# Altium PCB Copy of PCB.PcbDoc
Units mil, origin at the board's own origin, x right, y up, seen from the top; angles counter-clockwise.
Board outline 2570 x 1020 mil, 4 copper layers (Top Layer, Layer 1, Layer 2, Bottom Layer), stack 23.756 mil thick; 32 components, 41 nets, 168 pads, 105 vias.
Unrouted connection lines stored in the file: 1.
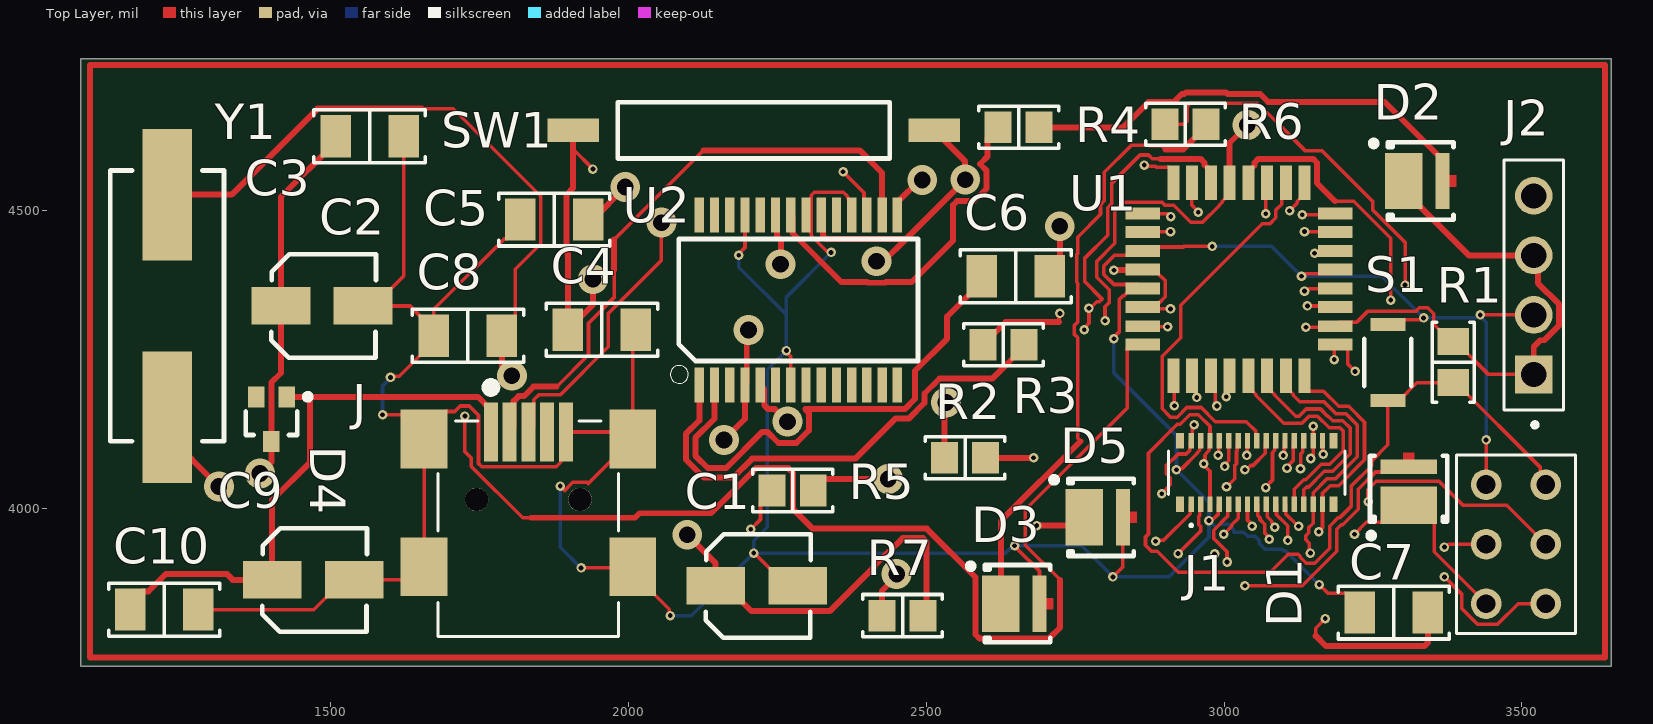
[diagram p0: Top Layer view]
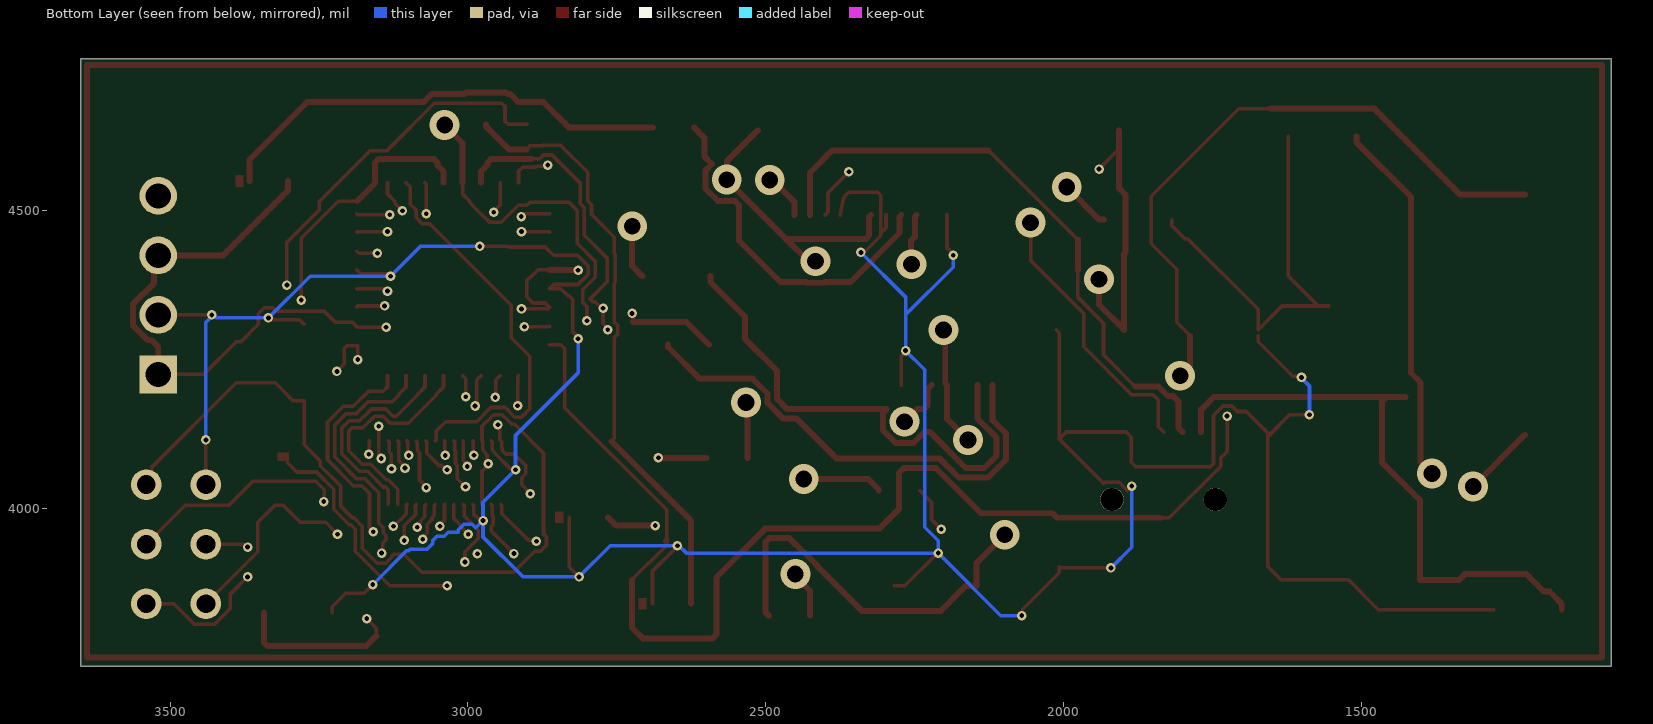
[diagram p1: Bottom Layer view, seen from below]
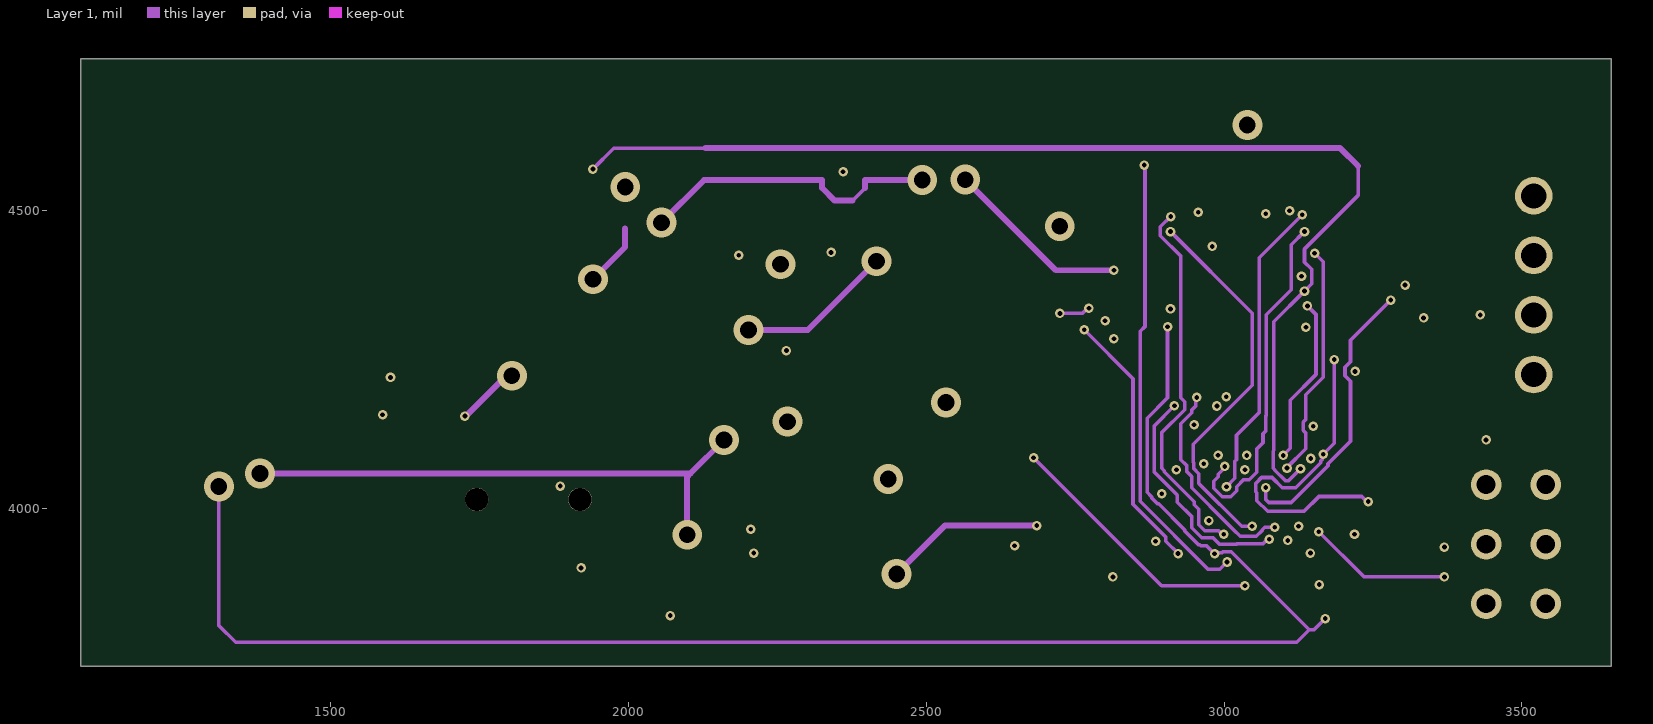
[diagram p2: Layer 1]
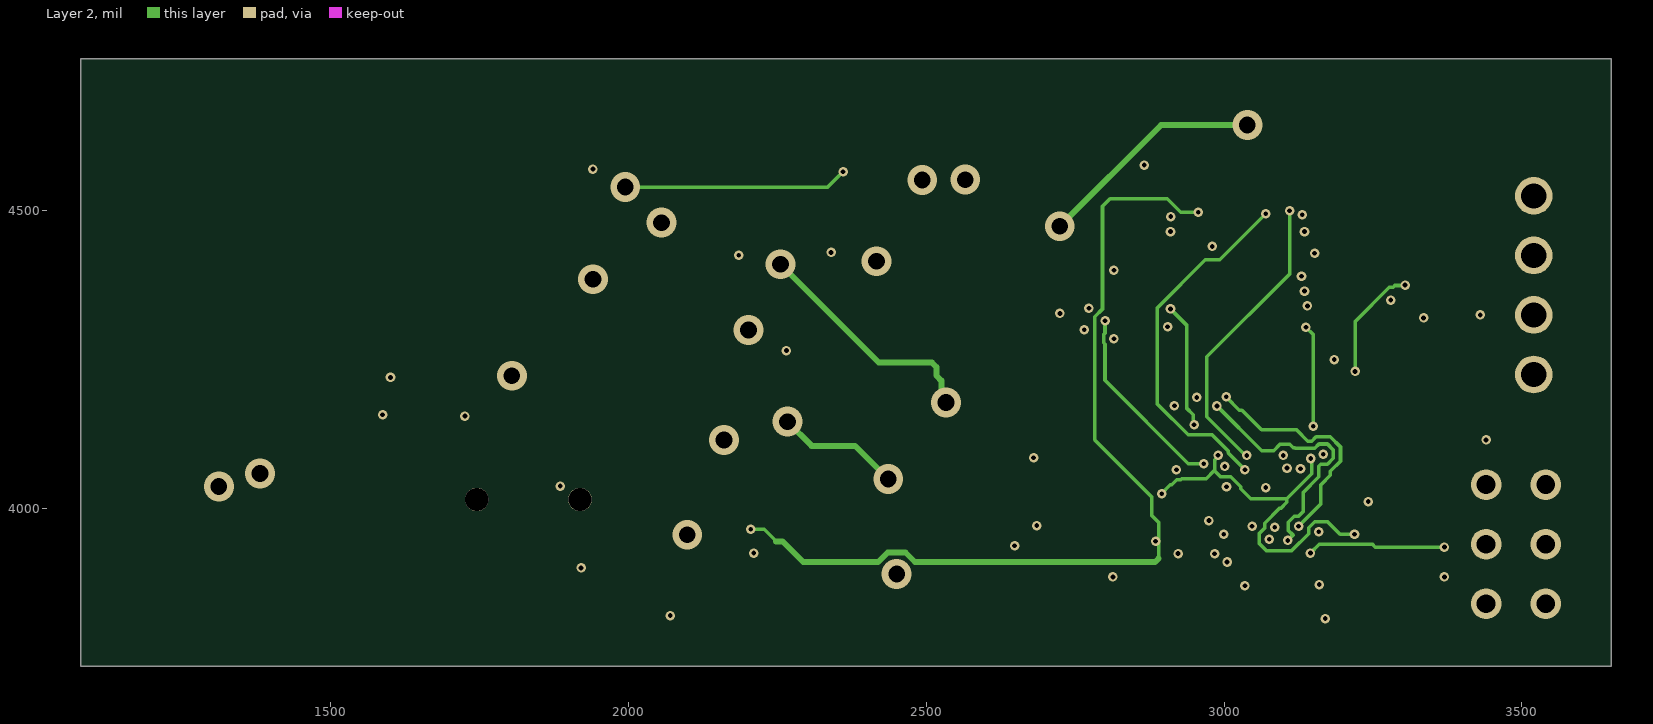
[diagram p3: Layer 2]

## Layer stack, top to bottom
Top Solder: solder mask 0.4, Solder Resist, Dk 3.5
Top Layer: signal copper 1.4
Dielectric 2: prepreg 2.8, PP-006, Dk 4.1
Layer 1: signal copper 1.378
Dielectric 1: dielectric 12.6, FR-4, Dk 4.8
Layer 2: signal copper 1.378
Dielectric 3: prepreg 2.8, PP-006, Dk 4.1
Bottom Layer: signal copper 1.4
Bottom Solder: solder mask 0.4, Solder Resist, Dk 3.5

## Board outline
1080,3735 3650,3735 3650,4755 1080,4755

## Design rules (kind name [scope] priority, off if disabled: settings)
Clearance [All] p1: gap=6 ignorepadtopadclearanceinfootprint=FALSE
PolygonConnect [All] p1: connectstyle=Relief reliefconductorwidth=10 reliefentries=4 polygonreliefangle="90 Angle" airgapwidth=10
RoutingVias RoutingVias_1 [All] p1: holewidth=8 width=16 viastyle="Through Hole" minholewidth=8 minwidth=16 maxholewidth=8 maxwidth=16
RoutingVias [All] p2 off: holewidth=28 width=50 viastyle="Through Hole" minholewidth=28 minwidth=50 maxholewidth=28 maxwidth=50
SolderMaskExpansion [All] p1: expansion=4 istentingtop=FALSE
SupplyNets "Schematic Supply Nets_3" [InNet('GND')] p1: voltage=0.000
SupplyNets "Schematic Supply Nets_2" [InNet('VUSB')] p2: voltage=0.000
SupplyNets "Schematic Supply Nets_1" [InNet('3V3')] p3: voltage=0.000
SupplyNets "Schematic Supply Nets" [InNet('+5')] p4: voltage=0.000
Width Width_1 [All] p1: maxlimit=6 minlimit=6 preferedwidth=6 minimp=50.000000 maximp=50.000000 favimp=50.000000
Width [All] p2 off: maxlimit=10 minlimit=10 preferedwidth=10
30 further rules are at their usual default settings.

## Classes and differential pairs
component class Schematic: C1 C2 C3 C4 C5 C6 C7 C8 C9 C10 C11 D1 D2 D3 D4 D5 J J2 R1 R2 R3 R4 R5 R6 R7 S1 SW1

## Components (designator, comment, footprint, x,y, rotation, side; value= is the part's Value field where it differs from the comment)
C1 "4.7 uF" "CAP ALSMD 4.3MM H5.4MM" 2215,3870 r0 top value="10 µF"
C2 "4.7 uF" "CAP ALSMD 4.3MM H5.4MM" 1485,4340 r0 top value="10 µF"
C3 "1000 pF" "CAP 1206_3216 - 0.8MM" 1565,4625 r180 top
C4 "1000 pF" "CAP 1206_3216 - 0.8MM" 1955,4300 r0 top
C5 "1000 pF" "CAP 1206_3216 - 0.8MM" 1875,4485 r0 top
C6 "1000 pF" "CAP 1206_3216 - 0.8MM" 2650,4390 r0 top
C7 "1000 pF" "CAP 1206_3216 - 0.8MM" 3285,3825 r0 top
C8 "1000 pF" "CAP 1206_3216 - 0.8MM" 1730,4290 r0 top
C9 "" "CAP ALSMD 4.3MM H5.4MM" 1470,3880 r0 top value="10 µF"
C10 "1000 pF" "CAP 1206_3216 - 0.8MM" 1220,3830 r0 top
C11 "1000 pF" "CAP 1206_3216 - 0.8MM" 7150,1050 r0 top
D1 "" "LUMINUS MP-3030-110" 3310,4033.15 r90 top
D2 "" "LUMINUS MP-3030-110" 3330,4550 r0 top
D3 "L_AMBER" "LUMINUS MP-3030-110" 2653.15,3840 r0 top
D4 "BZX84W-B43F" "DIODES SOT-323-3" 1400,4150 r270 top
D5 "MP-3030-1100-57-70" "LUMINUS MP-3030-110" 2793.19,3985 r0 top
J "MUSB-05-S-B-SM-A" SAMTEC_MUSB-05-S-B-SM-A 1831.61,4128.39 r0 top
J1 "DF40C-30DP-0.4V(51)" HRS_DF40C-30DP-0.4V(51) 3055,4060 r0 top
J2 "PPTC041LFBN-RC" SULLINS_PPTC041LFBN-RC 3520,4375 r90 top
R1 "1K Ohms" "RES 0805_2012" 3385,4245.55 r270 top
R2 "" "RES 0805_2012" 2565,4085 r180 top
R3 "1K Ohms" "RES 0805_2012" 2629.45,4275 r0 top
R4 "" "RES 0805_2012" 2655,4640 r0 top
R5 "1K Ohms" "RES 0805_2012" 2275.55,4030 r0 top
R6 "680 Ohm" "RES 0805_2012" 2935,4645 r0 top
R7 "1.8 MOhms" "RES 0805_2012" 2460,3820 r0 top
S1 "KXT 311 LHS" "C&K KXT3" 3275,4245 r90 top
SW1 "CT10-1530-G1" "COTO TECHNOLOGY - CT10 G1" 2210,4635 r0 top
U1 "ATMEGA168-20AUR" QFP80P900X900X120-32N 3025,4385 r0 top
U2 "INTERFACE-FT232RL(SSOP28)" SSOP28-0.65-10.2X5.2MM 2285,4350 r0 top
Y1 "16 MHz" "ABRACON ABLS" 1225,4340 r90 top value="37.5 MHz"
? "AVR-ISP" AVR-ISP 3490,3940 r90 top

## Footprints (in the part's own frame and the unit in brackets; to place one, negate y for a bottom-side part, rotate by r counter-clockwise, add the part's x,y. Pads: shape width x height; smd on the part's side, far side on the other; paste and mask are expansions set on the pad)
"ABRACON ABLS" [mm] "Crystal, 2-Leads, Body 4.70x11.40mm, Pitch 8.80mm, IPC Medium Density"
  rect 5.6x2.1 smd: 1(-4.75,0) 2(4.75,0)
  silkscreen extent -5.77,-2.43 5.77,2.43, body extent -6.35,-2.35 6.35,2.35, height 4.2
AVR-ISP [mm]
  round 1.308 hole 0.8: GND(2.54,1.27) MISO(-2.54,-1.27) MOSI(0,1.27) RST(2.54,-1.27) SCK(0,-1.27) VCC(-2.54,1.27)
  silkscreen extent -3.81,-2.54 3.81,2.54
"C&K KXT3" [mm]
  rect 0.55x1.5 smd: 1(-1.625,0) 2(1.625,0)
  silkscreen extent -1,-1 1,1, body extent -1.75,-1 1.75,1, height 0.58
"CAP 1206_3216 - 0.8MM" [mm] "Chip Capacitor, 2-Leads, Body 3.25x1.60mm, IPC Medium Density"
  rect 1.3x1.8 smd: 1(-1.45,0) 2(1.45,0)
  silkscreen extent -2.37,-1.12 2.37,1.12, body extent -1.6,-0.8 1.6,0.8, height 0.8
"CAP ALSMD 4.3MM H5.4MM" [mm] "Aluminum Electrolytic Capacitor, Body 4.30x4.30x5.40mm, IPC Low Density"
  rect 2.5x1.6 smd: 1(-1.75,0) 2(1.75,0)
  silkscreen extent -2.17,-2.21 2.3,2.2, body extent -2.3,-2.2 2.3,2.2, height 5.4
"COTO TECHNOLOGY - CT10 G1" [mm] "Switch, Body 16.38x2.92x2.41mm, IPC Medium Density"
  rect 2.2x1 smd: 1(-7.7,0) 2(7.7,0)
  silkscreen extent -5.8,-1.2 5.8,1.2, body extent -8.23,-1.2 8.23,1.2, height 2.96
"DIODES SOT-323-3" [mm] "SOT323, 3-Leads, Body 2.00x2.10mm, Pitch 0.65mm, IPC Medium Density"
  rect 0.9x0.7 smd: 1(-0.95,0.65) 2(0.95,0) 3(-0.95,-0.65)
  silkscreen extent -1.07,-1.1 0.67,1.68, body extent -1.06,-1 1.06,1, height 1
HRS_DF40C-30DP-0.4V(51) [mm]
  rect 0.23x0.66 smd paste-1 mask+0: 1(-2.8,-1.355) 2(-2.8,1.355) 3(-2.4,-1.355) 4(-2.4,1.355) 5(-2,-1.355) 6(-2,1.355) 7(-1.6,-1.355) 8(-1.6,1.355) 9(-1.2,-1.355) 10(-1.2,1.355) 11(-0.8,-1.355) 12(-0.8,1.355) 13(-0.4,-1.355) 14(-0.4,1.355) 15(0,-1.355) 16(0,1.355) 17(0.4,-1.355) 18(0.4,1.355) 19(0.8,-1.355) 20(0.8,1.355) 21(1.2,-1.355) 22(1.2,1.355) 23(1.6,-1.355) 24(1.6,1.355) 25(2,-1.355) 26(2,1.355) 27(2.4,-1.355) 28(2.4,1.355) 29(2.8,-1.355) 30(2.8,1.355)
  rect 0.35x0.66 smd paste-1: S1(-3.275,-1.355) S2(-3.275,1.355) S3(3.275,-1.355) S4(3.275,1.355)
  silkscreen extent -3.76,-2.31 3.76,0.92, body extent -3.76,-1.49 3.76,1.49, height 1.14
"LUMINUS MP-3030-110" [mm]
  rect 1.6x2.4 smd paste-0.25: 1(-0.715,0)
  rect 0.6x2.4 smd paste-0.2: 2(0.935,0)
  Top Layer region: 1.185,-0.251 1.535,-0.251 1.535,0.249 1.185,0.249
  silkscreen extent -2.12,-1.65 1.4,1.72, body extent -1.51,-1.51 1.51,1.51, height 0.53
QFP80P900X900X120-32N [mil]
  rect 58x20 smd: 1(-162,110) 2(-162,79) 3(-162,47) 4(-162,16) 5(-162,-16) 6(-162,-47) 7(-162,-79) 8(-162,-110) 17(162,-110) 18(162,-79) 19(162,-47) 20(162,-16) 21(162,16) 22(162,47) 23(162,79) 24(162,110)
  rect 20x58 smd: 9(-110,-162) 10(-79,-162) 11(-47,-162) 12(-16,-162) 13(16,-162) 14(47,-162) 15(79,-162) 16(110,-162) 25(110,162) 26(79,162) 27(47,162) 28(16,162) 29(-16,162) 30(-47,162) 31(-79,162) 32(-110,162)
  body extent -177,-177 177,177, height 47
"RES 0805_2012" [mm] "Chip Resistor, 2-Leads, Body 2.00x1.25mm, IPC Medium Density"
  rect 1.15x1.35 smd: 1(-0.875,0) 2(0.875,0)
  silkscreen extent -1.7,-0.9 1.7,0.9, body extent -1,-0.62 1,0.63, height 0.6
SAMTEC_MUSB-05-S-B-SM-A [mm]
  rect 0.6x2.5 smd: 1(-1.6,0) 2(-0.8,0) 3(0,0) 4(0.8,0) 5(1.6,0)
  rect 2x2.5 smd: 6(-4.45,-0.3) 7(4.45,-0.3) 8(-4.45,-5.75) 9(4.45,-5.75)
  round 1 hole 1 unplated: ""(-2.2,-2.88) ""(2.2,-2.88)
  silkscreen extent -3.85,-8.73 3.85,2.1
SSOP28-0.65-10.2X5.2MM [mm]
  rect 0.4x1.5 smd: 1(-4.225,-3.625) 2(-3.575,-3.625) 3(-2.925,-3.625) 4(-2.275,-3.625) 5(-1.625,-3.625) 6(-0.975,-3.625) 7(-0.325,-3.625) 8(0.325,-3.625) 9(0.975,-3.625) 10(1.625,-3.625) 11(2.275,-3.625) 12(2.925,-3.625) 13(3.575,-3.625) 14(4.225,-3.625) 15(4.225,3.625) 16(3.575,3.625) 17(2.925,3.625) 18(2.275,3.625) 19(1.625,3.625) 20(0.975,3.625) 21(0.325,3.625) 22(-0.325,3.625) 23(-0.975,3.625) 24(-1.625,3.625) 25(-2.275,3.625) 26(-2.925,3.625) 27(-3.575,3.625) 28(-4.225,3.625)
  silkscreen extent -5.46,-3.56 5.1,2.6, body extent -3.9,-5.1 3.9,5.1, height 2
SULLINS_PPTC041LFBN-RC [mm]
  rect 1.605x1.605 / inner round 1.605 / far side rect 1.605x1.605 hole 1.07: 1(-3.81,0)
  round 1.605 hole 1.07: 2(-1.27,0) 3(1.27,0) 4(3.81,0)
  silkscreen extent -6.06,-1.27 5.33,1.27, body extent -5.33,-1.27 5.33,1.27, height 8.51

## Part data
C1 C2 C9: library part UWX1C100MCL1GB, "CAP ALUM 10UF 20% 16V SMD", Capacitance="10 µF", Device Package="Radial, Can - SMD", Lifetime @ Temp.="2000 Hrs @ 85°C", manufacturer=Nichicon, Operating Temperature="-40°C ~ 85°C", Ripple Current @ High Frequency="34.5 mA @ 10 kHz", Ripple Current @ Low Frequency="23 mA @ 120 Hz", Supplier Part Number 1=493-2100-1-ND, Tolerance=±20%, Voltage - Rated="16 V", Applications="General Purpose", componentlink1description=Datasheet, componentlink1url=https://products.nichicon.co.jp/en/pdf/XJA043/e-uwx.pdf, componentlink2description="DigiKey Link", componentlink2url=https://www.digikey.com/en/products/detail/nichicon/UWX1C100MCL1GB/589841, Height - Seated (Max)="0.213\" (5.40mm)", lastupdated="6/3/2024 7:53:00 PM", Lifecycle Status=Active, Minimum Order=1, Mounting Type="Surface Mount", Package / Case="Radial, Can - SMD", packaging=TapeAndReel, Part Number=UWX1C100MCL1GB, Part Status=Active, partid=7030, Polarization=Polar, price=0.06, series=UWX, Size / Dimension="0.157\" Dia (4.00mm)", Supplier 1=DigiKey, Surface Mount Land Size="0.169\" L x 0.169\" W (4.30mm x 4.30mm)"
C3 C4: library part AC1206JRNPO9BN102, "CAP CER 1000PF 50V C0G/NPO 1206", Capacitance="0.1 uF", Device Package="1206 (3216 Metric)", manufacturer=Yageo, Operating Temperature="-55°C ~ 125°C", Ratings=AEC-Q200, Supplier Part Number 1=311-3202-1-ND, Temperature Coefficient="C0G, NP0", Tolerance=±5%, Voltage - Rated=50V, Applications=Automotive, componentlink1description=Datasheet, componentlink1url=http://www.yageo.com/NewPortal/_en/search/productDocs.jsp?YageoPartNumber=AC1206JRNPO9BN102, componentlink2description="DigiKey Link", componentlink2url=https://www.digikey.com/en/products/detail/yageo/AC1206JRNPO9BN102/6643188, lastupdated="6/4/2024 7:10:41 PM", Lifecycle Status=Active, Minimum Order=1, Mounting Type="Surface Mount, MLCC", Package / Case="1206 (3216 Metric)", packaging=TapeAndReel, Part Number=AC1206JRNPO9BN102, Part Status=Active, partid=18692, price=0.05, series=AC, Size / Dimension="0.126\" L x 0.063\" W (3.20mm x 1.60mm)", Supplier 1=DigiKey, Thickness (Max)="0.028\" (0.70mm)"
C5 C6 C10 C11: library part AC1206JRNPO9BN102, "CAP CER 1000PF 50V C0G/NPO 1206", Device Package="1206 (3216 Metric)", manufacturer=Yageo, Operating Temperature="-55°C ~ 125°C", Ratings=AEC-Q200, Supplier Part Number 1=311-3202-1-ND, Temperature Coefficient="C0G, NP0", Tolerance=±5%, Voltage - Rated=50V, Applications=Automotive, componentlink1description=Datasheet, componentlink1url=http://www.yageo.com/NewPortal/_en/search/productDocs.jsp?YageoPartNumber=AC1206JRNPO9BN102, componentlink2description="DigiKey Link", componentlink2url=https://www.digikey.com/en/products/detail/yageo/AC1206JRNPO9BN102/6643188, lastupdated="6/4/2024 7:10:41 PM", Lifecycle Status=Active, Minimum Order=1, Mounting Type="Surface Mount, MLCC", Package / Case="1206 (3216 Metric)", packaging=TapeAndReel, Part Number=AC1206JRNPO9BN102, Part Status=Active, partid=18692, price=0.05, series=AC, Size / Dimension="0.126\" L x 0.063\" W (3.20mm x 1.60mm)", Supplier 1=DigiKey, Thickness (Max)="0.028\" (0.70mm)"
  C11: Capacitance="1000 pF"
C7 C8: library part AC1206JRNPO9BN102, "CAP CER 1000PF 50V C0G/NPO 1206", Capacitance="15 pF", Device Package="1206 (3216 Metric)", manufacturer=Yageo, Operating Temperature="-55°C ~ 125°C", Ratings=AEC-Q200, Supplier Part Number 1=311-3202-1-ND, Temperature Coefficient="C0G, NP0", Tolerance=±5%, Voltage - Rated=50V, Applications=Automotive, componentlink1description=Datasheet, componentlink1url=http://www.yageo.com/NewPortal/_en/search/productDocs.jsp?YageoPartNumber=AC1206JRNPO9BN102, componentlink2description="DigiKey Link", componentlink2url=https://www.digikey.com/en/products/detail/yageo/AC1206JRNPO9BN102/6643188, lastupdated="6/4/2024 7:10:41 PM", Lifecycle Status=Active, Minimum Order=1, Mounting Type="Surface Mount, MLCC", Package / Case="1206 (3216 Metric)", packaging=TapeAndReel, Part Number=AC1206JRNPO9BN102, Part Status=Active, partid=18692, price=0.05, series=AC, Size / Dimension="0.126\" L x 0.063\" W (3.20mm x 1.60mm)", Supplier 1=DigiKey, Thickness (Max)="0.028\" (0.70mm)"
D1 D2 D3: library part MP-3030-1100-57-70, "LED MID PWR 5700K 70CRI 3030", Color="White, Cool", CRI (Color Rendering Index)=70, Current - Max=240mA, Current - Test=150mA, Device Package="1212 (3030 Metric)", Flux @ 25°C, Current - Test="78lm (Typ)", Lumens/Watt @ Current - Test="173 lm/W", manufacturer="Luminus Devices Inc.", Supplier Device Package=3030, Supplier Part Number 1=1214-1349-1-ND, Voltage - Forward (Vf) (Typ)=3V, CCT (K)=5700K, componentlink1description=Datasheet, componentlink1url=https://download.luminus.com/datasheets/Luminus_MP3030_1100_Datasheet.pdf, componentlink2description="DigiKey Link", componentlink2url=https://www.digikey.com/en/products/detail/luminus-devices-inc/MP-3030-1100-57-70/5731698, Height - Seated (Max)="0.020\" (0.52mm)", lastupdated="6/3/2024 8:04:16 PM", Lifecycle Status=Active, Minimum Order=1, Mounting Type="Surface Mount", Package / Case="1212 (3030 Metric)", packaging=TapeAndReel, Part Number=MP-3030-1100-57-70, Part Status=Active, partid=16, price=0.05, series=MP-3030, Size / Dimension="0.118\" L x 0.118\" W (3.00mm x 3.00mm)", Supplier 1=DigiKey, Viewing Angle=110°
D4: "DIODE ZENER 43V 275MW SOT323", Part Number=BZX84W-B43F
D5: "LED MID PWR 5700K 70CRI 3030", Color="White, Cool", CRI (Color Rendering Index)=70, Current - Max=240mA, Current - Test=150mA, Device Package="1212 (3030 Metric)", Flux @ 25°C, Current - Test="78lm (Typ)", Lumens/Watt @ Current - Test="173 lm/W", manufacturer="Luminus Devices Inc.", Supplier Device Package=3030, Supplier Part Number 1=1214-1349-1-ND, Voltage - Forward (Vf) (Typ)=3V, CCT (K)=5700K, componentlink1description=Datasheet, componentlink1url=https://download.luminus.com/datasheets/Luminus_MP3030_1100_Datasheet.pdf, componentlink2description="DigiKey Link", componentlink2url=https://www.digikey.com/en/products/detail/luminus-devices-inc/MP-3030-1100-57-70/5731698, Height - Seated (Max)="0.020\" (0.52mm)", lastupdated="6/3/2024 8:04:16 PM", Lifecycle Status=Active, Minimum Order=1, Mounting Type="Surface Mount", Package / Case="1212 (3030 Metric)", packaging=TapeAndReel, Part Number=MP-3030-1100-57-70, Part Status=Active, partid=16, price=0.05, series=MP-3030, Size / Dimension="0.118\" L x 0.118\" W (3.00mm x 3.00mm)", Supplier 1=DigiKey, Viewing Angle=110°
J: "USB - mini B USB 2.0 Priz KonektÃ¶rÃ¼ 5 Pozisyon YÃ¼zeye Montaj, Dik AÃ§Ä±", Package=None, Availability=Unavailable, MF=Samtec, MP=MUSB-05-S-B-SM-A, price=None, SnapEDA_Link=https://www.snapeda.com/parts/MUSB-05-S-B-SM-A/Samtec%20Inc./view-part/227451/?ref=snap
J1: "30 Position Connector Plug, Outer Shroud Contacts Surface Mount Gold", Package=None, Availability="In Stock", Check_prices=https://www.snapeda.com/parts/DF40C-30DP-0.4V(51)/Hirose+Electric+Co+Ltd/view-part/?ref=eda, MF="Hirose Electric", MP=DF40C-30DP-0.4V(51), price=None, Purchase-URL=https://pricing.snapeda.com/search?q=DF40C-30DP-0.4V(51)&ref=eda, SnapEDA_Link=https://www.snapeda.com/parts/DF40C-30DP-0.4V(51)/Hirose+Electric+Co+Ltd/view-part/?ref=snap
J2: "4 Position Header Connector 0.100 (2.54mm) Through Hole Tin", Package=None, Check_prices=https://www.snapeda.com/parts/PPTC041LFBN-RC/Sullins/view-part/?ref=eda, MF="Sullins Connector", MP=PPTC041LFBN-RC, SnapEDA_Link=https://www.snapeda.com/parts/PPTC041LFBN-RC/Sullins/view-part/?ref=snap
R1 R2 R3 R4 R5 R6: library part RG2012P-185-B-T5, "RES 1.8M OHM 0.1% 1/8W 0805", Device Package="0805 (2012 Metric)", manufacturer=Susumu, Operating Temperature="-55°C ~ 155°C", Power (Watts)="0.125W, 1/8W", Ratings=AEC-Q200, Resistance="1.8 MOhms", Supplier Device Package=0805, Supplier Part Number 1=408-2026-1-ND, Temperature Coefficient=±25ppm/°C, Tolerance=±0.1%, componentlink1description=Datasheet, componentlink1url=http://www.susumu.co.jp/common/pdf/n_catalog_partition01_en.pdf, componentlink2description="DigiKey Link", componentlink2url=https://www.digikey.com/en/products/detail/susumu/RG2012P-185-B-T5/7035370, Composition="Thin Film", Features="Anti-Sulfur, Automotive AEC-Q200", Height - Seated (Max)="0.020\" (0.50mm)", lastupdated="2/8/2024 9:02:39 PM", Lifecycle Status=Active, Minimum Order=1, Number of Terminations=2, Package / Case="0805 (2012 Metric)", packaging=TapeAndReel, Part Number=RG2012P-185-B-T5, Part Status=Active, partid=27693, price=0.07, series=RG, Size / Dimension="0.079\" L x 0.049\" W (2.00mm x 1.25mm)", Supplier 1=DigiKey
R7: library part RG2012P-185-B-T5, "RES 1.8M OHM 0.1% 1/8W 0805", Device Package="0805 (2012 Metric)", manufacturer=Susumu, Operating Temperature="-55°C ~ 155°C", Power (Watts)="0.125W, 1/8W", Ratings=AEC-Q200, Supplier Device Package=0805, Supplier Part Number 1=408-2026-1-ND, Temperature Coefficient=±25ppm/°C, Tolerance=±0.1%, componentlink1description=Datasheet, componentlink1url=http://www.susumu.co.jp/common/pdf/n_catalog_partition01_en.pdf, componentlink2description="DigiKey Link", componentlink2url=https://www.digikey.com/en/products/detail/susumu/RG2012P-185-B-T5/7035370, Composition="Thin Film", Features="Anti-Sulfur, Automotive AEC-Q200", Height - Seated (Max)="0.020\" (0.50mm)", lastupdated="2/8/2024 9:02:39 PM", Lifecycle Status=Active, Minimum Order=1, Number of Terminations=2, Package / Case="0805 (2012 Metric)", packaging=TapeAndReel, Part Number=RG2012P-185-B-T5, Part Status=Active, partid=27693, price=0.07, Resistance="1.8 MOhms", series=RG, Size / Dimension="0.079\" L x 0.049\" W (2.00mm x 1.25mm)", Supplier 1=DigiKey
S1: "SWITCH TACTILE SPST-NO 0.02A 15V", Contact Rating @ Voltage="0.02A @ 15VDC", manufacturer=C&K, Operating Force=100gf, Operating Temperature="-40°C ~ 85°C", Supplier Part Number 1=CKN10777CT-ND, Actuator Height off PCB, Vertical=0.60mm, Actuator Orientation="Top Actuated", Actuator Type=Standard, Circuit=SPST-NO, componentlink1description=Datasheet, componentlink1url=https://dznh3ojzb2azq.cloudfront.net/products/Tactile/KXT3/documents/datasheet.pdf, componentlink2description="DigiKey Link", componentlink2url=https://www.digikey.com/en/products/detail/c-k/KXT-311-LHS/6599752, Illumination=Non-Illuminated, lastupdated="6/3/2024 8:19:27 PM", Lifecycle Status=Active, Minimum Order=1, Mounting Type="Surface Mount", Outline="3.00mm x 2.00mm", packaging=TapeAndReel, Part Number="KXT 311 LHS", Part Status=Active, price=0.13, series=KXT3, Supplier 1=DigiKey, Switch Function=Off-Mom, Termination Style="SMD (SMT) Tab"
SW1: "SWITCH REED SPST-NO 500MA 140V", Part Number=CT10-1530-G1
U1: "AVR AVRÂ® ATmega Microcontroller IC 8-Bit 20MHz 16KB (8K x 16) FLASH 32-TQFP (7x7)", Package="TQFP-32 Microchip", Check_prices=https://www.snapeda.com/parts/ATMEGA168-20AUR/Microchip/view-part/?ref=eda, MF="Microchip Technology", MP=ATMEGA168-20AUR, SnapEDA_Link=https://www.snapeda.com/parts/ATMEGA168-20AUR/Microchip/view-part/?ref=snap
U2: "USB Bridge, USB to UART USB 2.0 UART Interface 28-SSOP", Package="SSOP-28 FTDI", Check_prices=https://www.snapeda.com/parts/FT232RL/FTDI%252C+Future+Technology+Devices+International+Ltd/view-part/?ref=eda, MF="FTDI, Future", MP=FT232RL, SnapEDA_Link=https://www.snapeda.com/parts/FT232RL/FTDI%252C+Future+Technology+Devices+International+Ltd/view-part/?ref=snap
Y1: library part ABLS-37.500MHZ-12-1-U-F-T, "CRYSTAL 37.5000MHZ 12PF SMD", ESR (Equivalent Series Resistance)="80 Ohms", Frequency="37.5 MHz", Frequency Stability=±10ppm, Load Capacitance=12pF, manufacturer="Abracon LLC", Operating Mode=Fundamental, Operating Temperature="0°C ~ 60°C", Package / Case=HC-49/US, Supplier Part Number 1=535-10795-1-ND, componentlink1description=Datasheet, componentlink1url=https://abracon.com/Resonators/abls.pdf, componentlink2description="DigiKey Link", componentlink2url=https://www.digikey.com/en/products/detail/abracon-llc/ABLS-37-500MHZ-12-1-U-F-T/2623659, Frequency Tolerance=±10ppm, Height - Seated (Max)="0.165\" (4.20mm)", lastupdated="6/3/2024 8:02:03 PM", Lifecycle Status=Active, Minimum Order=1, Mounting Type="Surface Mount", packaging=CutTape, Part Number=ABLS-37.500MHZ-12-1-U-F-T, Part Status=Active, partid=6, price=1.58, series=ABLS, Size / Dimension="0.449\" L x 0.185\" W (11.40mm x 4.70mm)", Supplier 1=DigiKey, Type="MHz Crystal"
?: "Emulators / Simulators AVR USB IN CIRCUIT EMUL/PRGMR ISP", Package=None, Availability=Unavailable, MF=Gravitech, MP=AVR-ISP, price=None, SnapEDA_Link=https://www.snapeda.com/parts/AVR-ISP/Gravitech/view-part/4593377/?ref=snap

## Via types
v1: diameter 16, hole 8, Top Layer to Bottom Layer, 86 vias
v2: diameter 50, hole 28, Top Layer to Bottom Layer, 19 vias

## Nets (pads, with @x,y where several pads share a name; then routed paths per layer and width w, separated by ;. In a path a pad name is that pad's centre, name@x,y a point inside that pad or via, vN(x,y) a via of type N, cw(c..) or ccw(c..) an arc to the next point about the centre after c; other vN are vias at no path point)
3V3: C5.2 U2.17 | length 550.3
  Top Layer w6: v1(2360,4565.24) 2395.28,4529.95 2395.28,4497.59 U2.17
  Top Layer w10: C5.2 1939.53,4485 v2(1994.21,4539.68)
  Layer 2 w6: v2(1994.21,4539.68) 2334.45,4539.68 v1(2360,4565.24)
+5: ?.VCC C1.1 C2.1 C3.2 D1.1 D2.1 D4.2 J1.2 J1.8 J1.28 J2.1 J2.3 R1.1 R7.2 SW1.2 U1.4 U1.6 U1.18 U2.4 U2.20 | length 6242.8
  Top Layer w6: U1.4 2882,4401 2895,4388 2895.73,4388 2901,4382.73 2901,4355.27 2890.73,4345 2870,4345 U1.6 2866,4335 v1(2910,4335) ; v1(2895.15,4024.8) 2895.15,4025.15 2909.52,4039.52 2909.52,4051.44 2903,4057.96 2903,4072.04 2912.96,4082 2913.42,4082 2922.77,4091.35 2936.68,4091.35 2941.95,4096.63 2941.95,4099.84 2943.24,4101.12 2943.24,4111.82 J1.2 2946.29,4114.88 2946.29,4134.59 2949.49,4137.78 v1(2949.49,4140.49) ; v1(2989.84,4089.41) 2990.92,4090.49 2990.92,4112.26 J1.8 ; v1(3137.38,4304.42) 3185.42,4304.42 U1.18 3194,4313 3223.11,4313 3240.92,4330.8 3321.76,4330.8 3327.96,4337 3342.04,4337 3352,4327.04 3352,4309.06 3381.06,4280 3388.94,4280 3443.94,4225 J2.1 ; v1(3145.44,4083.85) 3145.44,4086.55 3149.49,4090.6 3149.49,4110 J1.28@3149.63,4110.15 ; J1.28 3149.74,4113.6 v1(3149.74,4138) ; v1(3218.99,3956.7) 3238.8,3976.5 3281.5,3976.5 D1.1 3324.5,4005 3353,3976.5 3353,3927 ?.VCC
  Top Layer w10: v2(1380.97,4058.62) 1400,4077.64 D4.2 1400,4211.36 1416.1,4227.46 C2.1 1416.1,4523.35 1507.91,4615.16 C3.2 ; v2(2098.21,3955.87) 2146.1,3907.97 C1.1 2163.82,3870 2206.32,3827.5 2337.67,3827.5 2414,3903.84 2414,3904.91 2435.09,3926 2436.16,3926 2460.16,3950 2494.14,3950 2500,3944.14 2500,3825.55 R7.2 ; v2(2160,4115) 2195.43,4150.43 U2.4 2198.31,4210.16 2198.31,4296.51 v2(2201.4,4299.6) ; U2.20 2326.26,4489.84 2326.26,4458.05 2332.12,4452.19 2465.12,4452.19 ; v2(2416.16,4415.03) 2427.95,4415.03 2465.12,4452.19 ; SW1.2 2565.16,4582.99 v2(2565.16,4552.23) 2465.12,4452.19 ; v1(2815,4400) 2815.5,4400.5 2862.5,4400.5 U1.4@2862.78,4400.78 ; D2.1 3301.85,4534.25 3411.1,4425 J2.3 3526.83,4418.17 3526.83,4378.41 3562.59,4342.64 3562.59,4307.36 3537.64,4282.41 3530.81,4282.41 3520,4271.59 J2.1
  Layer 1 w10: v2(1380.97,4058.62) 2103.62,4058.62 ; v2(2098.21,3955.87) 2098.21,4053.21 2103.62,4058.62 ; v2(2160,4115) 2103.62,4058.62 ; v2(2201.4,4299.6) 2300.73,4299.6 v2(2416.16,4415.03) ; v2(2565.16,4552.23) 2717.39,4400 v1(2815,4400)
  Layer 2 w6: v1(2895.15,4024.8) 2895.15,4025.15 2909.52,4039.52 2912.22,4039.52 2920.71,4048 2927.04,4048 2929.04,4050 2970,4050 2984,4064 ; v1(2910,4335) 2936.98,4308.02 2936.98,4168.5 2947.99,4157.49 2947.99,4141.99 v1(2949.49,4140.49) ; v1(2989.84,4089.41) 2989.84,4086.7 2984,4080.86 2984,4064 ; v1(3137.38,4304.42) 3150,4291.8 3150,4138.26 v1(3149.74,4138) ; v1(3145.44,4083.85) 3147,4082.29 3147,4057.96 3105.28,4016.24 ; v1(3218.99,3956.7) 3194.77,3956.7 3173.59,3977.88 3152.08,3977.88 3142,3967.81 3142,3957.45 3113.75,3929.2 3070.82,3929.2 3058.69,3941.33 3058.69,3957.65 3068.16,3967.12 3068.16,3975.27 3092.89,4000 3095,4000 3105.28,4010.28 3105.28,4016.24 ; 2984,4064 2984,4063.4 2993.96,4053.44 3011.08,4053.44 3027.9,4036.63 3027.9,4033.06 3044.72,4016.24 3105.28,4016.24
A0: J1.10 U1.23 | length 679.3
  Top Layer w6: v1(3001,4070.44) 3001,4073.15 3007.76,4079.91 J1.10 ; v1(3135,4465) 3186,4465 U1.23
  Layer 1 w6: v1(3001,4070.44) 3001,4068.13 2990.14,4057.27 2990.14,4053.03 2982.49,4045.38 2982.49,4033.96 2997,4019.44 3011.08,4019.44 3021.04,4029.4 3021.04,4036.47 3032.57,4048 3042.04,4048 3054.88,4060.84 3054.88,4099.88 3065.37,4110.37 3065.37,4125.37 3070.26,4130.26 3070.26,4155.36 3071,4156.1 3071,4325.04 3113,4367.04 3113,4443 v1(3135,4465)
A1: J1.12 U1.24 | length 651.3
  Top Layer w6: v1(3004.04,4036.44) 3004.71,4036.44 3018,4049.74 3018,4072.04 3020.88,4074.92 3020.88,4096.12 3021.98,4097.22 3021.98,4111.82 J1.12 ; v1(3131.09,4493.09) 3185.09,4493.09 U1.24
  Layer 1 w6: v1(3004.04,4036.44) 3018,4050.4 3018,4079.16 3020.88,4082.04 3020.88,4122.95 3059,4161.07 3059,4421 v1(3131.09,4493.09)
A2: J1.14 U1.25 | length 579.7
  Top Layer w6: v1(3037.88,4089.08) 3038.57,4089.77 3038.57,4112.66 J1.14 ; v1(3110,4500) 3123,4513 3123,4516 3135,4528 U1.25
  Layer 2 w6: v1(3037.88,4089.08) 3035.67,4089.08 2970.98,4153.77 2970.98,4254.61 3110,4393.63 v1(3110,4500)
A3: J1.16 U1.26 | length 676.9
  Top Layer w6: J1.16 3053.47,4114.87 3053.47,4129.37 3037.17,4145.68 2985.31,4145.68 2961.5,4169.49 2937.47,4169.49 2921.26,4153.28 2909.85,4153.28 2896,4167.13 2896,4255.73 2927,4286.73 2927,4341.04 3063.96,4478 3077.04,4478 3087,4487.96 3087,4501.04 3097,4511.04 3097,4540 U1.26
A4: J1.18 U1.27 | length 723.7
  Top Layer w6: v1(3035,4065) 3037.71,4065 3044.78,4072.08 3048.63,4072.08 3069.22,4092.67 3069.22,4111.82 J1.18 ; v1(3070,4495) 3070,4545 U1.27
  Layer 2 w6: v1(3035,4065) 3006.84,4093.16 3006.84,4096.45 2979.8,4123.49 2939.64,4123.49 2888,4175.13 2888,4337.04 2968.52,4417.56 2992.56,4417.56 v1(3070,4495)
A5: J1.20 U1.28 | length 1015.1
  Top Layer w6: v1(3069.98,4034.93) 3069.98,4036.48 3081.22,4047.73 3081.22,4093.57 3084.28,4096.63 3084.28,4097.82 3084.97,4098.51 3084.97,4111.38 J1.20@3086.72,4113.13 ; 3186.32,4516 3217.73,4516 3280,4453.73 v1(3280,4350)
  Top Layer w10: U1.28 3041,4566 3051,4576 3051,4580.56 3057.44,4587 3149.56,4587 3156,4580.56 3156,4546.32 3186.32,4516
  Layer 1 w6: v1(3069.98,4034.93) 3070.07,4034.83 3070.07,4014.93 3075,4010 3112.6,4010 3174.44,4071.83 3174.44,4075.07 3212.23,4112.86 3212.23,4213.73 3203,4222.96 3203,4237.04 3212.23,4246.27 3212.23,4282.23 v1(3280,4350)
A6: J1.22 U1.19 | length 353.2
  Top Layer w6: v1(3099.44,4088.94) 3100.84,4090.34 3100.84,4111.94 J1.22 ; v1(3140,4340) 3185,4340 U1.19
  Layer 1 w6: v1(3099.44,4088.94) 3099.44,4089.34 3111.26,4101.16 3111.26,4181.88 3154.38,4225 3154.38,4325.62 v1(3140,4340)
A7: J1.24 U1.22 | length 482.5
  Top Layer w6: v1(3105.64,4067.83) 3105.64,4070.27 3116.44,4081.07 3116.44,4096.04 3116.46,4111.82 J1.24 ; v1(3152,4428.55) 3183.55,4428.55 U1.22
  Layer 1 w6: v1(3105.64,4067.83) 3105.64,4068.8 3137.06,4100.22 3137.06,4126.65 3132.74,4130.96 3132.74,4145.04 3137.06,4149.35 3137.06,4190.71 3166.38,4220.03 3166.38,4414.18 v1(3152,4428.55)
AREF: C4.1 J1.26 SW1.1 U1.20 | length 2683.3
  Top Layer w6: SW1.1 1906.85,4603.15 v1(1940,4570) ; v1(3128.3,4066.7) 3128.44,4066.85 3128.44,4091.07 3132.21,4094.84 3132.21,4111.82 J1.26 ; v1(3135,4365) 3137.71,4365 3141.71,4369 U1.20
  Top Layer w10: SW1.1 1906.85,4538.34 1895.5,4526.99 1895.5,4429.92 1897.91,4427.5 C4.1 1940.05,4342.13 v2(1940.05,4385.05)
  Layer 1 w6: v1(1940,4570) 1975.14,4605.14 2129.23,4605.14 ; v1(3128.3,4066.7) 3128.3,4066.45 3108.64,4046.8 3102.49,4046.8 3085,4064.28 3085,4065 3082.44,4067.56 3082.44,4096.25 3083.64,4097.45 3083.64,4313.64 v1(3135,4365) ; v1(3135,4365) 3147,4377.04 3147,4401.65 3135,4413.65 3135,4435.6 3225,4525.6 3225,4575
  Layer 1 w10: v2(1940.05,4385.05) 1993.89,4438.9 1993.89,4469.81 ; 2129.23,4605.14 3194.86,4605.14 3225,4575
D0/RX: J1.3 R3.1 U1.30 | length 1264.2
  Top Layer w6: 2722.75,4313.11 2722.75,4325.83 v1(2724.36,4327.45) ; v1(2765,4300) 2765,4302.71 2773.08,4310.78 v1(2773.08,4336.16) 2775.14,4336.16 2786.13,4347.15 2790.38,4347.15 2795,4351.77 2766.31,4380.47 2766.31,4420.62 2804.46,4458.77 2804.46,4505.16 2810.96,4511.66 2810.96,4545.74 2858.82,4593.59 2872.9,4593.59 2879.5,4587 2893.15,4587 ; v1(2922.72,3924.19) 2960.51,3961.98 2960.51,3969.69 2957.58,3972.62 2957.58,3986.7 2958.98,3988.11 2958.98,4005.13 J1.3
  Top Layer w10: R3.1 2633.11,4313.11 2722.75,4313.11 ; 2893.15,4587 2960.56,4587 2967,4580.56 2967,4577 2978,4566 U1.30
  Layer 1 w6: v1(2724.36,4327.45) 2761.66,4327.45 2770.37,4336.16 v1(2773.08,4336.16) ; v1(2765,4300) 2847,4218 2847,4006.99 2901.97,3952.01 2901.97,3944.94 v1(2922.72,3924.19)
D1/TX: J1.1 R5.1 U1.31 | length 1772.6
  Top Layer w6: v1(2205,3965) 2221.46,3981.46 2221.46,4010.36 R5.1 ; v1(2884.97,3944.97) 2886.89,3946.89 2898.91,3946.89 2943.24,3991.22 2943.24,4005.13 J1.1 ; U1.31 2946,4509 2956.65,4498.35 v1(2956.65,4497.34)
  Layer 2 w6: v1(2205,3965) 2227.45,3965 2247.64,3944.82 ; v1(2884.97,3944.97) v1@2890,3944.97 ; 2890,3915.86 v1@2890,3944.97 ; v1(2956.65,4497.34) 2927.06,4497.34 2904.4,4520 2808.51,4520 2795.76,4507.24 2795.76,4334.8 2783,4322.04 2783,4114.98 2878.15,4019.83 2878.15,3988.33 2890,3976.47 v1@2890,3944.97
  Layer 2 w10: 2247.64,3944.82 2258.37,3944.82 2293.19,3910 2419.09,3910 2435.09,3926 2464.91,3926 2480.91,3910 2884.14,3910 2890,3915.86
D2: J1.9 U1.32 | length 955.7
  Top Layer w6: v1(2865.86,4576.59) 2867.46,4575 2883.86,4575 2885.86,4573 2908,4573 2915,4566 U1.32 ; v1(3005,3910) 3004.88,3910.12 3004.88,3927 2982.51,3949.37 2982.51,3963.55 3006.23,3987.27 3006.23,4005.13 J1.9
  Layer 1 w6: v1(2865.86,4576.59) 2867.14,4575.31 2867.14,4305.48 2859,4297.34 2859,4011.96 2972.96,3898 2992.96,3898 v1(3005,3910)
D3: J1.11 U1.1 | length 741.5
  Top Layer w6: U1.1 2905.36,4495 v1(2910.21,4490.15) ; v1(2999.51,3956.51) 3013,3970 3013,3972.71 3023.5,3983.21 J1.11
  Layer 1 w6: v1(2910.21,4490.15) 2893,4472.94 2893,4457.96 2927,4423.96 2927,4186.08 2933.9,4179.19 2933.9,4165.91 2895,4127.01 2895,4068.03 2899.51,4063.52 2899.51,4061.45 2949.72,4011.24 2949.72,4006.24 2957.58,3998.38 2957.58,3972.62 2967.54,3962.66 2990.64,3962.66 2996.8,3956.51 v1(2999.51,3956.51)
D4: J1.13 U1.2 | length 731.3
  Top Layer w6: U1.2 2864,4465 v1(2910,4465) ; J1.13 3039.25,3980.45 3047,3972.71 v1(3047,3970)
  Layer 1 w6: v1(2910,4465) 3047,4328 3047,4207 2948,4108 2948,4078.01 2949,4077.01 2949,4066.96 2957.52,4058.44 2957.52,4041.95 3029.47,3970 v1(3047,3970)
D5: J1.15 U1.9 | length 508.1
  Top Layer w6: U1.9 2916.49,4221.51 v1(2916.49,4172.55) ; J1.15 3056.53,4005.13 3056.53,3988.18 3060.28,3984.43 3060.28,3981.29 3068.09,3973.47 3068.09,3958.68 3075.69,3951.07 v1(3075.69,3948.37)
  Layer 1 w6: v1(2916.49,4172.55) 2883,4139.06 2883,4060.99 2921.52,4022.47 2921.52,4010.45 2945.58,3986.39 2945.58,3967.65 2962.57,3950.66 2981.31,3950.66 2992.46,3939.51 3020.59,3939.51 3022.08,3941 3065.62,3941 3072.99,3948.37 v1(3075.69,3948.37)
D6: J1.17 U1.10 | length 435.5
  Top Layer w6: U1.10 2953,4216 2953,4187.47 v1(2953.98,4186.49) ; J1.17 3072.28,4005.13 3072.28,3986.26 3080.09,3978.44 3080.09,3976.01 3085.16,3970.93 v1(3085.16,3968.23)
  Layer 1 w6: v1(2953.98,4186.49) 2952.07,4184.58 2952.07,4171.41 2945.9,4165.24 2945.9,4160.94 2927.04,4142.09 2927.04,4082 2937,4072.04 2937,4061.99 2945.52,4053.47 2945.52,4034.48 3006.49,3973.51 3006.55,3973.51 3016.51,3963.55 3016.51,3963.49 3027,3953 3054.04,3953 3064,3962.96 3064,3964.23 3067.99,3968.23 v1(3085.16,3968.23)
D7: J1.19 U1.11 | length 565.5
  Top Layer w6: U1.11 2985,4216 2985,4177.71 2987.98,4174.73 v1(2987.98,4172.02) ; J1.19 3088.02,4005.13 3088.02,3989.4 3106.71,3970.72 v1(3106.71,3946.2)
  Layer 2 w6: v1(2987.98,4172.02) 3063,4097 3083.18,4097 3093.8,4107.61 3110.45,4107.61 3116.06,4102 3118.3,4102 3119.29,4101.01 3152.3,4101.01 3159.45,4108.16 3173.53,4108.16 3183.49,4098.2 3183.49,4084.12 3173.53,4074.16 3162.51,4074.16 3159,4070.65 3159,4052.99 3132.75,4026.74 3132.75,3994.72 3125.03,3987 3117.96,3987 3108,3977.04 3108,3962.96 3115.73,3955.22 v1(3106.71,3946.2)
D8: J1.21 U1.12 | length 479.5
  Top Layer w6: v1(3003.54,4187.58) 3003.54,4217.54 U1.12 ; J1.21 3103.77,4005.13 3103.77,3990.63 3124.4,3970 v1(3125,3970)
  Layer 2 w6: v1(3003.54,4187.58) 3003.54,4187.22 3025.69,4165.07 3029.93,4165.07 3062.93,4132.07 3121.63,4132.07 3140.69,4113.01 3147.33,4113.01 3154.48,4120.16 3178.5,4120.16 3195.49,4103.17 3195.49,4079.15 3178.5,4062.16 3178.5,4055.52 3162.65,4039.67 3162.65,4007.65 v1(3125,3970)
D9: J1.23 U1.13 | length 387
  Top Layer w6: U1.13 3041,4204 3053,4192 3053,4190.27 3100.27,4143 3130.7,4143 3142.7,4155 3156.79,4155 3176.45,4135.34 3177.58,4135.34 3194.55,4135.34 3199.83,4130.07 3199.83,4096.63 3177.36,4074.16 3163.2,4074.16 3137.04,4048 3133.68,4048 3117.99,4032.31 J1.23
D10: J1.25 U1.14 | length 368.8
  Top Layer w6: U1.14 3072,4204 3085,4191 3085,4190.27 3120.27,4155 3125.73,4155 3137.73,4167 3161.76,4167 3173.76,4155 3174.89,4155 3182.55,4147.34 3199.53,4147.34 3211.83,4135.04 3211.83,4091.66 3182.33,4062.16 3168.17,4062.16 3142.01,4036 3138.65,4036 3133.74,4031.09 J1.25
D11/MOSI: ?.MOSI J1.27 U1.15 | length 734.1
  Top Layer w6: U1.15 3104,4204 3116,4192 3116,4190.27 3127.27,4179 3167.86,4179 3187.53,4159.34 3204.5,4159.34 3223.83,4140.01 3223.83,4086.69 3187.3,4050.16 3173.14,4050.16 3149.49,4026.51 J1.27 3149.49,3975.29 3142.12,3967.92 3142.12,3958.97 3136.91,3953.77 3136.91,3947.79 3143.09,3941.62 3143.09,3926.91 v1(3145,3925) ; v1(3370,3935) 3372.71,3935 3377.71,3940 ?.MOSI
  Layer 2 w6: v1(3145,3925) 3159.7,3939.7 3249.34,3939.7 3254.04,3935 v1(3370,3935)
D12/MISO: ?.MISO J1.29 U1.16 | length 842.3
  Top Layer w6: U1.16 3135,4204 3142,4197 3166.83,4197 3192.5,4171.34 3209.47,4171.34 3235.83,4144.98 3235.83,4081.72 3192.27,4038.16 3178.11,4038.16 3165.24,4025.28 J1.29 3165.24,3967.94 3159.12,3961.82 v1(3159.12,3960.88) ; v1(3370,3885) 3398.76,3856.24 3398.76,3832.1 3425.61,3805.25 3459.27,3805.25 3494.02,3840 ?.MISO
  Layer 1 w6: v1(3159.12,3960.88) 3235,3885 v1(3370,3885)
D13/SCK: ?.SCK J1.30 R6.1 U1.17 | length 1843.7
  Top Layer w6: R6.1 2932.19,4645 2937.64,4650.45 2937.64,4675.13 2943.08,4680.57 3056.25,4680.57 3135.83,4601 3164,4601 3250,4515 3250,4500.7 3303.91,4446.79 v1(3303.91,4375.14) ; J1.30 3165.86,4112.72 3165.86,4091.79 v1(3166.49,4091.16) ; v1(3185,4250) 3185,4273 3202.98,4273 3207.98,4268 3207.98,4242.02 v1(3220,4230) ; v1(3242.21,4011.47) 3241.47,4012.21 3241.47,4031.47 3255.5,4045.5 3360.97,4045.5 3401.22,4005.25 3474.75,4005.25 ?.SCK
  Layer 1 w6: v1(3185,4250) 3185,4109.67 v1(3166.49,4091.16) 3164.57,4089.25 3164.57,4082.18 3162.44,4080.04 3162.44,4076.81 3120.43,4034.8 3097.52,4034.8 3080.39,4051.93 3062.94,4051.93 3052.98,4041.97 3052.98,4027.88 3054.89,4025.97 3054.89,4013.13 3073.03,3995 3134.28,3995 3159.28,4020 3230.98,4020 3239.5,4011.47 v1(3242.21,4011.47)
  Layer 2 w6: v1(3220,4230) 3220,4314.04 3277.32,4371.36 3283.91,4371.36 3286.91,4374.36 3303.13,4374.36 v1(3303.91,4375.14)
GND: ?.GND C1.2 C2.2 C3.1 C4.2 C5.1 C7.1 C8.1 C9.2 C10.2 D3.2 D5.2 J1.4 J1.7 J2.2 J2.4 J.5 J.6 J.7 J.8 J.9 S1.2 U1.3 U1.5 U1.21 U2.7 U2.18 U2.21 U2.25 | length 7429
  Top Layer w6: C10.2 1471.18,3830 1521.18,3880 C9.2 1634.41,3880 J.8 J.6 J.6@1656.42,4120.84 ; C2.2 C2.2@1571.61,4340 ; v1(1586.63,4157.21) 1620.05,4157.21 J.6@1656.42,4120.84 ; v1(1600,4220) 1601.91,4221.91 1614.67,4221.91 1672.91,4280.16 C8.1 ; C3.1 1622.09,4390.47 C2.2@1571.61,4340 ; C5.1 1817.91,4475.16 1795.32,4452.57 1791.05,4452.57 1672.91,4334.43 1672.91,4299.84 1632.76,4340 C2.2@1571.61,4340 ; v1(1885.24,4037.56) 1892.73,4030.07 1906.35,4043.69 1930.11,4043.69 1932.02,4041.78 J.7 ; v1(1920,3900) 2004.8,3900 J.9 2006.81,3892.17 2068.09,3830.89 2068.09,3821.91 v1(2070,3820) ; C4.2 2006.81,4294.72 J.7 ; v1(2185,4425) 2185,4427.71 2195.43,4438.14 U2.25 ; v1(2210,3925) 2211.18,3925 2266.18,3870 C1.2 ; v1(2265,4265) 2265,4262.29 2272.2,4255.09 U2.7 ; U2.21 2297.8,4471.06 2306.51,4462.35 ; v1(2340,4430) 2338.09,4431.91 2332.59,4431.91 2308.27,4456.24 2306.51,4459.46 2306.51,4462.35 ; U2.18 2369.69,4519.24 2365.85,4525.97 2360.58,4531.24 cw(c2360,4565.24) 2359.25,4531.24 2311.78,4531.24 2306.51,4525.97 2306.51,4462.35 ; v1(2648.09,3937.48) 2653.09,3932.48 2653.09,3931.68 2689.96,3894.81 D3.2 ; v1(2813.36,3885.02) 2830,3901.67 D5.2 ; v1(2815,4285) 2815,4287.71 2823.59,4296.3 2823.59,4350.32 2830.27,4357 2832,4357 2844,4369 U1.5 2856,4376 2814.96,4376 2798,4392.96 2798,4407.04 2815.96,4425 2856,4425 U1.3 2870,4439 2931.69,4439 2932.69,4440 v1(2980,4440) ; v1(2920,4065) 2921.91,4066.91 2929.21,4066.91 2953.95,4091.66 2953.95,4092.29 2958.29,4096.63 2958.29,4097.85 2958.98,4098.54 2958.98,4111.82 J1.4 ; v1(2974.58,3979.66) 2976.49,3981.57 2981.43,3981.57 2990.48,3990.63 2990.48,4005.13 J1.7 ; v1(3130,4390) 3132.71,4390 3136.71,4394 3180,4394 U1.21 ; v1(3159.76,3872.06) 3174.39,3857.43 3205.32,3857.43 3227.91,3834.84 C7.1 ; S1.2 3282.83,4316.8 3329.1,4316.8 3332.29,4320 v1(3335,4320) ; v1(3430,4325) J2.2 ; ?.GND v1(3440,4115) ; J.6@1656.42,4120.84 1656.42,4126.42 1692.79,4162.79 1707.81,4162.79 1717.02,4172 1732.04,4172 1747.81,4156.23 1747.81,4075.45 1753.08,4070.17 1878.65,4070.17 1885.8,4077.32 1885.8,4119.57 J.5 1995,4128.39 J.7
  Bottom Layer w6: v1(1586.63,4157.21) 1586.63,4205.5 1600,4218.87 v1(1600,4220) ; v1(1885.24,4037.56) 1885.24,3934.76 v1(1920,3900) ; v1(2070,3820) 2105,3820 v1(2210,3925) ; v1(2185,4425) 2185,4405 2265,4325 ; v1(2340,4430) 2265,4355 2265,4325 ; v1(2815,4285) 2815,4227.5 2920,4122.5 v1(2920,4065) 2974.58,4010.42 v1(2974.58,3979.66) ; v1(2980,4440) 3080,4440 v1(3130,4390) 3265,4390 v1(3335,4320) 3422.29,4320 3427.29,4325 v1(3430,4325) 3430,4322.29 3440,4312.29 v1(3440,4115) ; v1(3159.76,3872.06) 3102.62,3929.2 3099.67,3929.2 3097.5,3931.37 3068.65,3931.37 3058.69,3941.33 3058.69,3946.31 3052,3953 3039.96,3953 3032.96,3960 3016.51,3960 3016.51,3963.55 3006.55,3973.51 2992.46,3973.51 2986.6,3967.64 v1(2974.58,3979.66) ; v1(2210,3925) 2632.91,3925 2645.39,3937.48 v1(2648.09,3937.48) 2760.9,3937.48 v1(2813.36,3885.02) 2907.59,3885.02 2974.58,3952.01 v1(2974.58,3979.66) ; v1(2210,3925) 2210,3945.96 2232.63,3968.59 2232.63,4232.63 v1(2265,4265) 2265,4325
NetC6_1: C6.1 U2.2 | length 855.5
  Top Layer w10: U2.2 2144.25,4150.67 2112.08,4118.5 2112.08,4088.67 2133.17,4067.59 2163.5,4067.59 2224.55,4128.64 2232.83,4128.64 2251.72,4109.75 2281.55,4109.75 2302.63,4130.83 2302.63,4160.66 2296.54,4166.76 2463.77,4166.76 2480.91,4183.9 2480.91,4230.91 2535,4285 2535,4322.24 2592.91,4380.16 C6.1
NetC7_2: C7.2 U1.7 Y1.1 | length 3233.6
  Top Layer w6: U1.7 2864,4305 v1(2905,4305) ; 3153.87,3786 3153.87,3798.87 v1(3170,3815)
  Top Layer w10: Y1.1@1225,4123.47 v2(1311.77,4036.69) ; 3153.87,3786 3171.16,3768.71 3336.23,3768.71 3342.09,3774.57 C7.2
  Layer 1 w6: v2(1311.77,4036.69) 1311.77,3803.23 1340,3775 3122.06,3775 3143.05,3795.99 ; v1(2905,4305) 2905,4185.68 2871,4151.68 2871,4026.98 2878.15,4019.83 2878.15,4017.76 2888.11,4007.8 2890.18,4007.8 2933.58,3964.4 2933.58,3962.68 2957.6,3938.66 2959.31,3938.66 2960.54,3937.44 2970.4,3937.44 v1(2983.92,3923.92) 2985.83,3925.83 2996.79,3925.83 2997.96,3927 3012.04,3927 3143.05,3795.99 ; v1(3170,3815) 3150.99,3795.99 3143.05,3795.99
NetC8_2: C8.2 U1.8 Y1.2 | length 3149.4
  Top Layer w6: 1652.23,4671.43 1705.23,4671.43 1852.5,4524.16 1852.5,4444.71 1809.68,4401.88 1809.68,4312.59 C8.2 ; v1(1725,4155) 1725,4095.43 1735.81,4084.62 1735.81,4070.47 1821.97,3984.31 1836.11,3984.31 ; 2724.58,3879.99 2666.27,3938.3 2666.27,3946.17 2666.27,3997.73 2837,4168.46 2837,4268 2844,4275 U1.8
  Top Layer w10: Y1.2 1333.34,4527.01 1477.77,4671.43 1652.23,4671.43 ; C8.2 1787.09,4239.57 v2(1803.89,4222.76) ; 1836.11,3984.31 2010.57,3984.31 2018.13,3991.87 2138.2,3991.87 2213.91,4067.57 2268.3,4067.57 2276.36,4059.51 2276.36,3998.87 2309.23,3966 2500.77,3966 2582.5,3884.27 2582.5,3788.2 2588.95,3781.76 2706.33,3781.76 2724.58,3800.01 2724.58,3879.99 ; 2666.27,3946.17 2667.09,3945.35
  Layer 1 w10: v1(1725,4155) 1726.62,4155 1794.38,4222.76 v2(1803.89,4222.76)
NetD1_2: D1.2 R2.1 | length 919.8
  Top Layer w6: v1(3035,3870) 3131.01,3870 3189.24,3928.22 3189.24,3965.19 3196.7,3972.66 3199.53,3972.66 3225.21,3998.35 3225.21,4032.18 3254.18,4061.15 3287.43,4061.15 D1.2@3303.05,4076.77
  Top Layer w10: R2.1 v1(2680,4085)
  Layer 1 w6: v1(2680,4085) 2895,3870 v1(3035,3870)
NetD2_2: D2.2 R4.2 | length 783.9
  Top Layer w10: R4.2 2830.78,4640 2873.36,4682.57 2915.5,4682.57 2928.92,4696 2933.05,4696 2935.63,4698.57 3003.27,4698.57 3005.85,4696 3046.63,4696 3046.68,4695.95 3060.68,4695.95 3074.05,4682.57 3269.67,4682.57 3366.81,4585.43 D2.2
NetD3_1: D3.1 R6.2 | length 1018.5
  Top Layer w6: 2758.75,4112.83 2754,4117.58 2754,4286.96 2748,4292.96 2748,4307.04 2754,4313.04 2754,4378.05 2752.31,4379.74 2752.31,4426.42 2754,4428.11 2754,4455.55 2792.46,4494.01 2792.46,4510.13 2798.96,4516.63 2798.96,4564.63 2843.93,4609.59 2874.02,4609.59 2874.19,4609.43 2895,4609.43 2901.43,4603
  Top Layer w10: D3.1 2625,3979.09 2758.75,4112.83 ; 2901.43,4603 2931.39,4603 2969.45,4641.06 R6.2
NetD5_1: D5.1 R7.1 | length 434.5
  Top Layer w10: R7.1 2425.55,3861.57 2450,3886.02 v2(2450,3890) ; v1(2685.27,3971.11) 2751.15,3971.11 D5.1
  Layer 1 w10: v2(2450,3890) 2531.11,3971.11 v1(2685.27,3971.11)
NetJ_2: J.2 U2.16 | length 1022.4
  Top Layer w6: 1879.09,4204.6 1932.5,4258.01 1932.5,4311.14 1975.5,4354.13 1975.5,4400.51 ; 1975.5,4451.41 2125.32,4601.24
  Top Layer w10: J.2 1806.93,4135.2 1806.93,4180.28 1815.25,4188.6 1824.12,4188.6 1840.12,4204.6 1879.09,4204.6 ; 1975.5,4400.51 1975.5,4451.41 ; 2125.32,4601.24 2387.91,4601.24 2425.75,4563.39 U2.16
NetJ_3: J.3 U2.15 | length 1055.8
  Top Layer w6: J.3 1840.43,4137.2 1840.43,4182.28 1848.74,4190.6 1884.89,4190.6 1965.74,4271.44 1965.74,4327.4 2055,4416.66 v2(2055,4480)
  Top Layer w10: U2.15 2451.34,4514.37 2488.38,4551.41 v2(2493.01,4551.41)
  Layer 1 w6: 2375.97,4516.96 2397.06,4538.05
  Layer 1 w10: v2(2055,4480) 2126.41,4551.41 2325.06,4551.41 2325.06,4538.05 2346.14,4516.96 2375.97,4516.96 ; 2397.06,4538.05 2397.06,4551.41 v2(2493.01,4551.41)
NetR2_2: R2.2 U2.23 | length 580
  Top Layer w10: U2.23 2249.49,4489.84 2249.49,4456.07 2255.56,4450 2255.56,4410.56 v2(2255,4410) ; R2.2 2530.55,4175.62 v2(2532.91,4177.98)
  Layer 2 w10: v2(2255,4410) 2420,4245 2509.14,4245 2516.91,4237.23 2516.91,4222.98 2525.26,4214.63 2525.26,4185.63 v2(2532.91,4177.98)
NetR4_1: R4.1 U2.22 | length 612.5
  Top Layer w10: U2.22 2275.08,4489.84 2275.08,4462.48 2357.55,4380 2400.27,4380 2401.25,4379.03 2431.07,4379.03 2432.04,4380 2475,4380 2545.01,4450.01 2545.01,4509.46 2551.79,4516.23 2580.07,4516.23 2601.16,4537.32 2601.16,4567.15 2589.94,4578.36 2602.91,4591.33 2602.91,4622.36 R4.1
RESET: ?.RST C6.2 J1.5 J1.6 R1.2 S1.1 U1.29 | length 2815.2
  Top Layer w6: v1(2800,4315) 2800,4338.85 2807,4345.85 2807,4366.99 2786,4387.99 2786,4414.77 2816.46,4445.24 2816.46,4500.19 2830.27,4514 2895.73,4514 2900.73,4509 2915.4,4509 2944.06,4480.34 2963.7,4480.34 2991.73,4508.37 2991.73,4509 2997,4514.27 2997,4516 3009,4528 U1.29 ; v1@2965.5,4075.5 2967.91,4077.91 2967.91,4089.28 2970.29,4091.66 2970.29,4092.88 2974.04,4096.63 2974.04,4097.64 2974.73,4098.34 2974.73,4111.82 J1.6@2976.03,4113.11 ; v1(2966,4075) 2966,4072.48 2976.26,4062.22 J1.5 ; J1.6 2976.26,4137.76 2956.53,4157.49 2942.45,4157.49 2926.23,4141.28 2921.38,4141.28 2873,4092.89 2873,3957.04 2867.97,3952.01 2867.97,3937.93 2877.93,3927.97 2887.99,3927.97 2922.96,3893 3077.55,3893 3107.55,3923 3124.49,3923 3128,3919.49 3128,3917.96 3137.96,3908 3152.04,3908 3177.24,3933.19 3177.24,3970.17 3191.73,3984.66 3194.55,3984.66 3213.21,4003.32 3213.21,4037.15 3247.83,4071.77 3247.83,4079.57 3275,4106.74 S1.1 3293.7,4181.02 3323.78,4211.1 R1.2 3388.94,4211.1 3531.29,4068.74 3531.29,4048.71 ?.RST
  Top Layer w10: C6.2 2724.11,4407.02 v2(2724.11,4473.74) ; U1.29 3009,4613.81 v2(3039.14,4643.95)
  Layer 2 w6: v1(2800,4315) 2800,4294.04 2798,4292.04 2798,4277.96 2800,4275.96 2800,4215 2940,4075 v1(2966,4075)
  Layer 2 w10: v2(2724.11,4473.74) 2894.32,4643.95 v2(3039.14,4643.95)
RX: R3.2 U2.1 | length 819
  Top Layer w10: U2.1 2118.66,4147.71 2096.08,4125.12 2096.08,4082.05 2126.54,4051.59 2175.29,4051.59 2207.28,4083.57 2380.59,4083.57 2447.77,4150.76 2470.4,4150.76 2496.91,4177.27 2496.91,4192.89 2521.92,4217.9 2610.73,4217.9 2663.9,4271.06 R3.2
TX: R5.2 U2.5 | length 431.1
  Top Layer w10: U2.5 2227.74,4200.57 2227.74,4173.2 2234.18,4166.76 2245.62,4166.76 v2(2266.63,4145.75) ; R5.2 2310,4031.67 2327.64,4049.31 v2(2435.83,4049.31)
  Layer 2 w10: v2(2266.63,4145.75) 2307.38,4105 2380.14,4105 v2(2435.83,4049.31)
VUSB: C9.1 C10.1 D4.1 J.1 | length 996.2
  Top Layer w10: C10.1 1162.91,3839.84 1183.5,3860.43 1193.35,3860.43 1222.91,3890 1325,3890 1335,3880 C9.1 1401.1,4013.8 1465,4077.7 1465,4179.14 1459.14,4185 ; D4.1 1747.01,4187.4 1768.62,4165.79 J.1
pads on no net: C11.1 C11.2 D4.3 J1.S1 J1.S2 J1.S3 J1.S4 J. J.4 U2.3 U2.6 U2.8 U2.9 U2.10 U2.11 U2.12 U2.13 U2.14 U2.19 U2.24 U2.26 U2.27 U2.28
copper on no net: | length 7080
  Top Layer w10: 1095,3750 3640,3750 3640,4745 1095,4745 1095,3750